# EAGLE board Simple-Analog-Amp-BC547 (EAGLE 7.2.0)
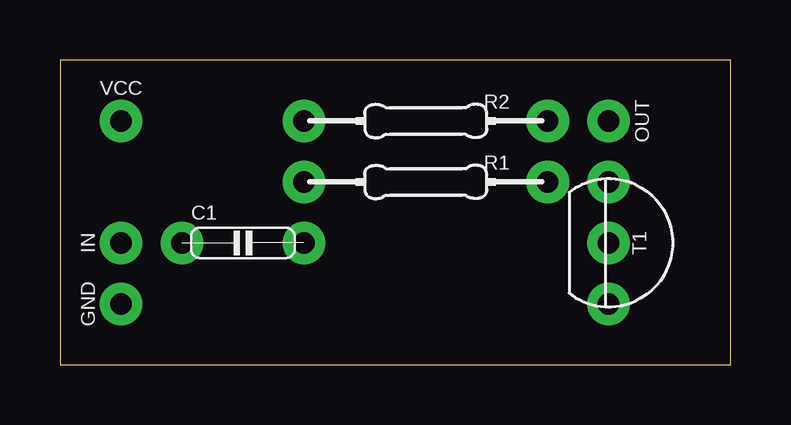
[diagram p0: board, top side]
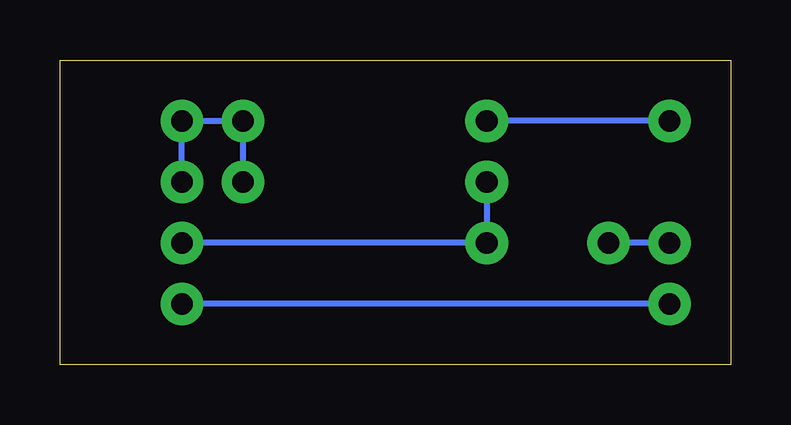
[diagram p1: board, bottom side, seen from below]

Size 27.94 x 12.7 mm. Coordinates in mm from the lower left corner, seen from the top.
Outline: 0,0 27.94,0 27.94,12.7 0,12.7 0,0
Copper layers (1*16): Top 0.035mm / dielectric 1.5mm / Bottom 0.035mm
Design rules "default": minimum track width 10mil, minimum drill 24mil, track to track 8mil, track to pad 8mil, pad to pad 8mil, via to via 8mil, smd to smd 8mil, copper to edge 40mil, drill to drill 8mil, minimum pad ring 10mil, minimum via ring 8mil, stop-mask expansion 4mil, vias tented up to drill 0mil, thermal gap 10mil

## Footprints (pad centres in the part's own frame; a part is rotated, then mirrored left to right if it is on the bottom)
C050-020X044 = drill 0.9 pad 1.778: 1 -2.54,0; 2 2.54,0
SPAD = drill 0.9 pad 1.778: 1 0,0
0204/10 = drill 0.9 pad 1.778: 1 -5.08,0; 2 5.08,0
TO92-CBE = drill 0.9 pad 1.778: 1 0,2.54; 2 0,0; 3 0,-2.54

## Placement (x,y rotation side)
C1  100n  [C050-020X044]  7.62,5.08 0 top
GND  VPORT  [SPAD]  2.54,2.54 0 top
IN  HPORT  [SPAD]  2.54,5.08 0 top
OUT  HPORT  [SPAD]  22.86,10.16 180 top
R1  470kΩ  [0204/10]  15.24,7.62 0 top
R2  1kΩ  [0204/10]  15.24,10.16 0 top
T1  BC547  [TO92-CBE]  22.86,5.08 0 top
VCC  VPORT  [SPAD]  2.54,10.16 270 top

## Library data of the parts
C1 = c
GND IN OUT VCC = pad
R1 R2 = r
T1 = t

## Nets
N$1: C1.2 R1.1 T1.2
N$2: OUT.1 R1.2 R2.2 T1.1
N$3: C1.1 IN.1
N$4: GND.1 T1.3
N$5: R2.1 VCC.1

## Tracks (layer width: path | path; a pad name or v marks a point on that pad's centre or on a via)
N$1
  Bottom 0.254: R1.1 C1.2 | R1.1 | C1.2 T1.2 | C1.2
N$2
  Bottom 0.254: R1.2 R2.2 OUT.1 T1.1
N$3
  Bottom 0.254: IN.1 C1.1
N$4
  Bottom 0.254: GND.1 T1.3 | T1.3 | GND.1
N$5
  Bottom 0.254: VCC.1 R2.1